# Altium PCB cpuPCB-v6.PcbDoc (part 2 of 3)
Units mil, origin at the board's own origin, x right, y up, seen from the top; angles counter-clockwise.
Board outline 3900 x 3900 mil, 2 copper layers (Top Layer, Bottom Layer); 139 components, 120 nets, 548 pads, 249 vias.
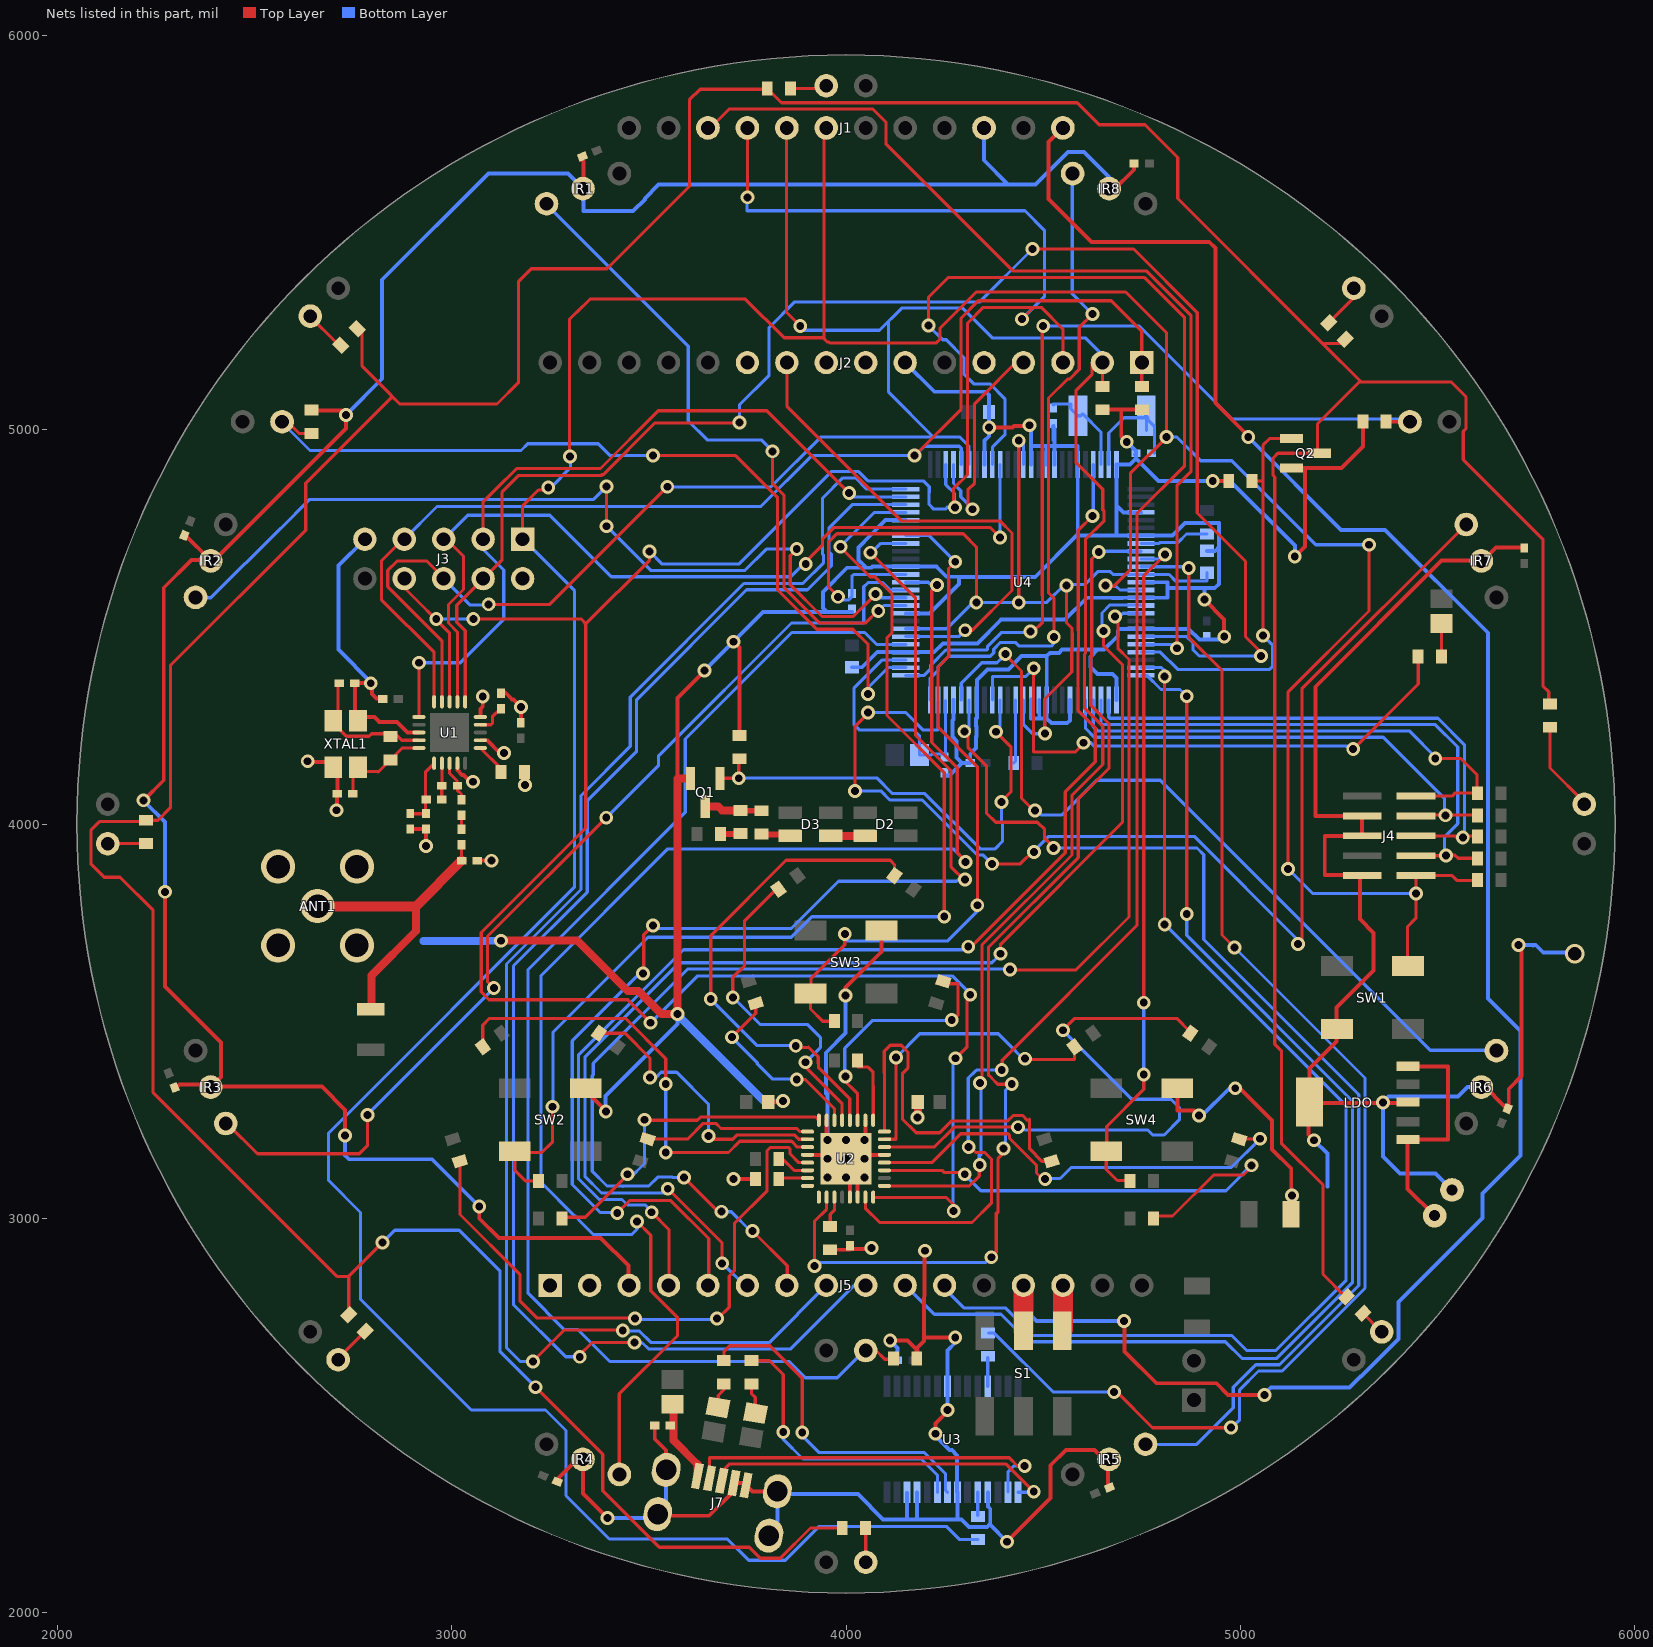
[diagram p2: the nets of this part, all layers, seen from the top]

## Via types
v1: diameter 35, hole 20, Top Layer to Bottom Layer, 240 vias
v2: diameter 180, hole 160, Top Layer to Bottom Layer, 4 vias
v3: diameter 25.98, hole 12.99, Top Layer to Bottom Layer, tented top, 4 vias
v4: diameter 50, hole 35, Top Layer to Bottom Layer, 1 vias

## Nets (pads, with @x,y where several pads share a name; then routed paths per layer and width w, separated by ;. In a path a pad name is that pad's centre, name@x,y a point inside that pad or via, vN(x,y) a via of type N, cw(c..) or ccw(c..) an arc to the next point about the centre after c; other vN are vias at no path point) (continued)
GND: ANT1.2 ANT1.3 ANT1.4 ANT1.5 C1.1 C2.1 C3.1 C4.1 C6.1 C7.1 C8.1 C9.1 C10.1 C11.1 C12.1 C13.1 C14.1 C15.1 C16.1 C17.1 C18.1 C19.2 C20.1 C21.1 C22.1 C23.1 C24.1 C25.1 C26.1 C27.1 C28.1 C29.1 C30.1 C31.1 C32.1 IR1.2 IR2.2 IR3.2 IR4.2 IR5.2 IR6.2 IR7.2 IR8.2 J1.10 J2.7 J3.9 J4.3 J4.5 J4.9 J5.3 J6.2 J7.4 J7.5 J7.6 J7.7 J7.8 J7.9 LDO.3 LDO.6 Q1.2 Q2.2 R2.1 R6.2 R9.2 R24.2 R25.1 R28.2 R35.1 R36.1 R40.1 R41.1 SW1.2 SW2.2 SW3.2 SW4.2 U1.8 U1.14 U1.17 U1.20 U2.5 U2.10 U2.15 U2.20 U2.29 U2.30 U2.33 U3.7 U3.18 U3.21 U3.25 U3.26 U4.4 U4.9 U4.15 U4.21 U4.33 U4.39 U4.41 U4.42 U4.45 U4.50 U4.54 U4.57 U4.63 U4.65 U4.69 U4.76 U4.82 U4.85 U4.86 U4.87 U4.94 U4.97 XTAL1.2 XTAL1.4 | length 28280.2
  Top Layer w10: v1(2219,4060) 2270,4111 2270,4599 2340,4669 IR2.2@2387,4669 ; v1(2273,3828) 2273,3588 2415,3446 2415,3359 IR3.2@2389,3333 ; C17.1@2300.55,3329.55 2310,3339 2370,3339 2375,3334 2671,3334 2730,3275 v1(2730,3210) ; C11.1@2325.5,4731.5 2387,4670 IR2.2@2387,4669 ; v1(2635,4159) 2637,4157 XTAL1.2@2700,4157 ; R6.2@2645,5048 2721,5048 v1(2732,5037) ; XTAL1.2@2700,4158.89 XTAL1.2@2700,4157 ; XTAL1.2@2701,4157 XTAL1.2@2700,4157 ; v1@2709.32,4036.32 C2.1@2709.32,4076 ; C2.1@2710,4078 2711,4079 2711,4136 2700,4147 XTAL1.2@2700,4157 ; v1@2732,5039 v1(2732,5037) ; C1.1@2754.68,4357.67 C1.1@2754.68,4357 v1(2795,4357) ; C1.1@2755,4357 2755,4283 XTAL1.4@2764,4274 ; XTAL1.4@2765,4262 2774,4271 2804,4271 2816.8,4258.2 2816.9,4258.31 ; v1@2798,4355 2798,4330 2810,4318 C8.1@2816.32,4318 ; 2816,4258.31 2862,4258.31 2888.31,4232 U1.8@2917.24,4232 ; C4.1@2897,3988 2897.68,3987.32 C3.1@2935,3987.32 v1(2935,3944) ; U1.14@3014.68,4154.24 3014.68,4136.77 3026.73,4124.73 ; 3026.95,4124.51 3030.49,4124.51 3049.5,4105.5 3051,4107 v1(3054,4107) ; C6.1@3064.68,3907 v1(3101,3907) ; v1(3070,3030) 3070,3000 3120,2950 3378,2950 3448,2880 J5.3@3448,2831 ; U1.17@3072.76,4212.31 3090.68,4212.31 3092,4211 ; U1.20@3072.76,4271.37 3072.76,4291.76 3079,4298 v1(3079,4323) ; 3091.99,4210.55 3120.54,4182 3131,4182 v1(3133,4180) ; C7.1@3127,4334 3135,4334 3154,4315 ; 3153,4316 3157,4316 v1(3176,4297) ; v1@3169.72,4297 v1(3176,4297) ; C9.1@3174,4256.69 3174.68,4256.69 C9.1@3175,4257 ; C9.1@3174,4257 3176,4259 v1(3176,4297) ; R2.1@3184.53,4142 3184.53,4103.53 3174.5,4093.5 3180.5,4093.5 v1(3186,4099) ; C23.1@3272,2332.91 3272,2343 3333,2404 3333,2302 v1(3395,2240) ; C10.1@3327,5687 3334,5679.99 IR1.2@3334,5608 ; SW2.2@3342,3319 3344,3319 v1@3391,3272 ; C15.1@3515,2469 3515,2441 3543.89,2412.11 J7.6@3543.89,2362.17 ; J7.7@3516,2246 3652.82,2246 3714.77,2307.96 3714.77,2327.89 J7.4@3715.93,2329.04 3740.96,2329.04 3763,2307 J7.9@3825,2307 ; 3572,4117 3573,4118 3573,4319 v1@3643,4389 ; v1(3715,3100) R24.2@3770.47,3100 ; v1(3715,4462) 3730,4447 R35.1@3730,4224.53 ; C14.1@3802.56,3295 3825,3295 v1@3826,3294 ; U2.20@3902.56,3161.14 U2.33@3952.76,3161.14 ; U2.33@3950.79,3205.79 U2.15@3950.79,3248.74 ; R25.1@3960,2920.47 4009.53,2920.47 4011.06,2922 4058,2922 4060,2920 v1(4065,2925) 4060,2925 v1@4057.44,2922.44 ; v1(3999,3565) 3999,3585 4090,3676 SW3.2@4090,3730 ; C20.1@4005,2921 4010,2921 C20.1@4010,2922.44 ; U2.29@4009.84,3053.86 U2.33@4009.84,3099.84 ; U2.30@4029.53,3053.86 U2.33@4029.53,3099.53 ; v1(4047.24,3198.54) 4051.14,3194.65 4051.14,3161.14 U2.5@4097.44,3161.14 ; U2.33@4049.21,3199.21 U2.10@4049.21,3248.74 ; v1(4112,2690) 4156,2690 4181,2665 R28.2@4181,2644 ; R28.2@4179,2649 4179,2670 4198,2689 4199,2914 v1@4200,2919 ; 4200,2698 v1(4277,2698) ; v1(4227,2454) 4227,2480 4257,2510 v1(4257,2514) ; v1(4363,5005) 4422,5005 4426,5009 v1@4465,5009 ; v1(4408,2180) 4432.5,2204.5 ; 4434,2206 4432.5,2204.5 ; R41.1@4650,5050 4651,5051 4698,5051 ; C24.1@4664.46,2320.55 IR5.2@4664.46,2380.54 ; IR5.2@4669,2392 4651,2392 4630,2413 4558,2413 4519,2374 4519,2291 4432.5,2204.5 ; IR8.2@4670,5606 4677,5606 4730,5659 C12.1@4730,5667.44 ; v1(4712,4969) 4698,4983 4698,5051 ; R40.1@4749,5051 4698,5051 ; SW4.2@4841,3329 4841,3274 4882,3274 v1(4895,3261) ; v1(4909,4569) 4959,4519 v1(4959,4475) ; v1(4930,4870) R36.1@4970.47,4870 ; v1(4987,3330) 4988,3330 5000,3327 5002,3327 5080.5,3248.5 5080.5,3174.5 5129,3126 C19.2@5129,3011 ; Q2.2@5124.57,4902.6 5164,4902.6 ; v1(5138,4678.58) 5163.42,4704 5164,4704 5164,4900 ; 5163,4902 5164,4903 5256,4903 5310.47,4957.47 R9.2@5310.47,5020 ; LDO.6@5173,3262 5173,3212 v1(5187,3198) ; LDO.6@5173,3293 LDO.3@5419,3293 ; LDO.6@5175,3297 5175,3380 5244,3449 5244,3535 5338,3629 5338,3724 5303,3759 5303,3871 5214,3871 5214,3970 J4.5@5308.89,3970 ; J4.5@5308.89,3968.89 J4.5@5308.89,3970 ; IR7.2@5608,4661 IR7.2@5613,4666 ; IR7.2@5608,4666 IR7.2@5613,4666 ; IR7.2@5608,4668 5510,4668 5190,4348 5190,4020.39 J4.3@5308.89,4020.39 J4.5@5308.89,3970 ; IR6.2@5620,3334 5668.54,3285.46 5680.55,3285.46 5680.55,3328.55 5713,3361 5713,3677 5698,3692 5699,3693 v1(5705,3693) ; C13.1@5713.44,4701 5648,4701 IR7.2@5613,4666 ; IR2.2@2387,4669 2388,4669 2389,4670 IR2.2@2389,4667 ; IR2.2@2387,4669 IR2.2@2389,4667 ; IR2.2@2389,4667 2395.69,4667 2732,5003.31 v1(2732,5037)
  Top Layer w20: v1(3125,3704) 3125,3705 3318,3705 3446.5,3576.5 3473.7,3576.5 3532.2,3518 v1(3573,3518) 3573,4115.43 Q1.2@3605.6,4115.43 ; v1@4182.44,3260.44 C21.1@4182.44,3295
  Bottom Layer w10: v1(2219,4060) 2219,4059 2273,4005 v1(2273,3828) ; v1(2730,3210) 2730,3160 2740,3150 2950,3150 v1(3070,3030) ; v1(2732,5037) v1@2732.5,5037.5 ; v1@2732,5038 v1@2732.5,5037.5 ; v1@2734,5039 v1@2732.5,5037.5 ; J3.9@2780,4722 2713,4655 2713,4442 v1@2797,4358 ; IR1.2@3331,5613 3295,5649 3093,5649 2824,5380 2824,5129 v1@2732.5,5037.5 ; IR1.2@3334,5608 3334,5554 3460.04,5554 3490.04,5584 3490.04,5586.04 3525,5621 4480,5621 4563,5704 4604,5704 4667,5641 IR8.2@4667,5611 ; v1@3390,3271 3390,3310 3573,3493 3573,3515 3573.5,3515.5 v1@3575,3517 ; v1(3395,2240) 3521,2240 J7.7@3523,2242 ; J7.7@3517,2259 3543.89,2285.89 J7.6@3543.89,2362.17 ; v1(3641,4389) 3789.5,4537.5 3789.56,4537.44 3952,4537.44 ; 3792,3297 v1@3824,3297 ; J7.8@3806,2206 3826.11,2226.11 J7.9@3826.11,2307.83 ; J7.9@3825,2301 4030,2301 4094,2237 4155,2237 ; 3949,3317 3949,3419.96 3999,3469.96 v1(3999,3565) ; v1@3952,3103 3952.76,3103.76 v1(3952.76,3104.06) v1(3952.76,3151.3) v1(3952.76,3198.54) 3952.76,3316.06 ; v1@3999,3102 4000,3103 v1(4000,3104.06) v1(4000,3151.3) v1(4000,3198.54) ; C27.1@4015,4397.44 4040.77,4397.44 4079.17,4435.83 U4.4@4151.56,4435.83 4223.83,4435.83 4246.2,4458.2 4333.29,4458.2 4393.58,4518.5 4554.5,4518.5 4555,4518 4610.63,4573.63 4675.24,4573.63 4675.37,4573.5 4700.63,4573.5 4700.76,4573.63 U4.65@4748.01,4573.63 4815,4573.63 4815,4598 ; C32.1@4015,4537.44 3952,4537.44 ; v1(4047.24,3104.06) 4047.24,3102.76 v1@4050,3100 ; v1(4047.24,3198.54) v1(4047.24,3151.3) 4047.24,3107.76 v1@4050,3105 ; 4050,4651.11 4031.5,4669.61 4031.5,4701.62 4063.36,4733.48 4063.48,4733.48 4100.48,4770.48 U4.21@4151.56,4770.48 ; 4065,4649.69 4002.96,4649.69 3941.28,4588.01 3941.28,4548.16 3952,4537.44 ; 4065,4650 4067.37,4652.37 U4.15@4151.56,4652.37 4229.63,4652.37 4255,4627 4480,4627 4584.11,4731.11 U4.57@4748.01,4731.11 4827.57,4731.11 4859.46,4763 4945.72,4763 4945.72,4702.28 ; v1@4113,2690 4113,2689 4130.31,2671.68 C16.1@4130.31,2640 ; J2.7@4150,5190 J2.7@4150,5170 4224,5096 4354.56,5096 4362.56,5088 C26.1@4362.56,5045 v1@4362.56,5004 ; U4.9@4151.56,4534.26 4211.26,4534.26 4286,4609 4286,4623.74 4283.74,4626 4479,4626 ; U3.26@4155,2304 4155,2237 ; 4180.43,2238.43 U3.25@4180.43,2305.55 ; v1(4181,3256) 4184,3256 v1@4189,3261 ; v1(4227,2454) 4227,2447.87 4262.37,2412.5 4268.5,2412.5 4282,2399 U3.21@4282,2306 ; C28.1@4250,4122.44 4262,4122.44 4294.56,4155 ; v1(4257,2514) 4257.2,2514.2 U3.7@4257.2,2574.45 4257.2,2664.8 4277,2684.59 v1(4277,2698) ; 4272.62,4265 4272.62,4265.62 ; U4.97@4272.62,4314.77 4272.62,4265.62 ; 4273,4266 4272.62,4265.62 ; 4282.8,2237 U3.21@4282.8,2305.55 ; J1.10@4350,5765 4350,5683 4410,5623 ; U4.33@4351.36,4911.23 4351.36,4972 4362.56,4983.2 v1@4362.56,5004 ; U3.18@4359.57,2305.55 4359.57,2269.84 4365.72,2263.69 4365.72,2225.36 4358.1,2217.75 4311.9,2217.75 4292.65,2237 4155,2237 ; 4363,2222 4366,2222 v1(4408,2180) ; v1(4363,5005) v1@4362.56,5004 ; 4400,4392 4412,4392 4445.5,4425.5 4508.5,4425.5 4517,4434 4540.13,4434 4548.13,4442 4637.87,4442 ; 4400.37,4391.5 4399.87,4392 4358.68,4392 4331.68,4365 U4.94@4331.68,4314.77 4331.68,4268.87 4330,4267.19 4330,4248.13 4330.5,4247.63 4330.5,4222.37 4330,4221.87 4330,4193 4315,4178 4315,4155 4294.56,4155 ; U4.87@4469,4316 4469,4268 4469.05,4267.95 4490.05,4267.95 ; U4.39@4469.47,4911.23 4469.47,4959 ; v1@4469.47,5006 4469.47,4959 ; U4.86@4490,4315 4490,4268 4490.05,4267.95 ; U4.85@4508.84,4314.77 4508.84,4267.95 ; U4.41@4508.84,4911.23 4508.84,4956.84 4510,4958 ; U4.85@4509,4314.77 4509,4425 ; C29.1@4525,5007.44 4525,5005 4528.53,5001.47 4528.53,4959 ; C29.1@4526,5009.71 4526,4973 4528.53,4970.47 ; U4.42@4528.53,4911.23 4528.53,4959 ; U4.82@4567.9,4314.77 4567.9,4262.9 4561,4256 4520.79,4256 4508.84,4267.95 ; 4585,4732 4587.58,4734.58 U4.45@4587.58,4911.23 4587.58,4959 4528.53,4959 ; 4651,4442 4637.87,4442 ; 4654,4442 4689,4477 4689,4490 4693.89,4494.89 U4.69@4748.01,4494.89 4868.55,4494.89 4896,4467.44 4952,4467.44 4959,4474.44 v1(4959,4475) ; IR8.2@4660,5604 IR8.2@4671,5593 ; U4.76@4686.01,4314.77 4686.01,4370 4675.5,4380.5 4637.37,4380.5 4619.5,4398.37 4619.5,4423.63 4637.87,4442 ; 4686,4808 4686,4808.17 ; 4688,4732 4687,4732 4686,4733 4686,4808.17 ; v1(4712,4969) 4735.31,4945.69 C30.1@4735.31,4940 C30.1@4735.31,4934.69 ; 4720,4911 4720.23,4911.23 ; 4720.77,4911.23 4720.23,4911.23 ; C30.1@4733,4937 C30.1@4735.31,4934.69 ; U4.63@4748.01,4613 4815,4613 4815,4598 ; U4.54@4748.01,4790.17 4704,4790.17 4686,4808.17 ; v1(4895,3261) 4903,3261 4972,3330 v1(4987,3330) ; v1(4909,4569) 4909,4598 ; C31.1@4915,4692.56 4936.28,4692.56 4945.72,4702 4945.72,4608.69 4935.03,4598 4909,4598 ; v1(5138,4678.58) 5138,4706 4974,4870 4792,4870 4735.69,4926.31 4735.31,4926.31 ; v1(5187,3198) 5221,3164 5221,3081 ; v1(5362,3294) 5362,3157 5405,3114 5494.78,3114 J6.2@5536.66,3072.12 ; v1@5362,3295 5376,3309 5552,3309 5576,3333 IR6.2@5611,3333 ; v1(5705,3693) 5741.5,3693 ; 5742.5,3692 5741.5,3693 ; v4@5852,3664 5842,3674 5768,3674 5749,3693 5741.5,3693 ; 4272.62,4265.62 4269.5,4262.5 4269.5,4222.37 4280.72,4211.15 4280.72,4168.84 4294.56,4155 ; 4469.47,4959 4528.53,4959 ; 4490.05,4267.95 4508.84,4267.95 ; 4686,4808.17 4686,4871.99 ; 4686,4871.99 U4.50@4686,4896 ; 4686.01,4872 U4.50@4686.01,4896.01 ; U4.50@4686.01,4896.01 U4.50@4686.01,4911.23 4720.23,4911.23 ; 4720.23,4911.23 4735.31,4926.31 ; 4735.31,4926.31 C30.1@4735.31,4934.69 ; 4815,4598 4909,4598
  Bottom Layer w20: 2928,3703 3090,3703 3091,3704 v1(3125,3704) ; v1(3573,3518) 3573,3516 3573.5,3515.5 3792,3297
  other v1: 4200,2918 5131,3058 3391,3271 3840,3298 2708,4035 4465,5011
  other v4: 5848,3671
GYRO_ST: J2.9
GYRO_VREF: J2.8
GYROA_X_4: J2.11
GYROA_Z_4: J2.10 U4.6 | length 1298.5
  Top Layer w8: J2.10@3850,5190 3850,5059.5 4141.5,4768 4390.95,4768 4421,4737.95 4421,4592 4320.2,4491.2 v1(4302.2,4491.2)
  Bottom Layer w8: U4.6@4151.56,4475.2 4286.2,4475.2 v1(4302.2,4491.2)
IR_RECV_0: IR1.1 U4.10 | length 1662.5
  Top Layer w8: v1@3814,4944 3814,4862.63 3842.5,4834.13 3842.5,4599.87 3932.37,4510 4050,4510 4080,4540 v1(4082,4540)
  Bottom Layer w8: IR1.1@3241.61,5569.73 3600,5211.34 3600,5022 3648,4974 3785,4974 v1(3814,4945) ; v1(4082,4540) 4095.94,4553.94 U4.10@4151.56,4553.94
IR_RECV_1: IR2.1 U4.11 | length 2262.2
  Top Layer w8: v1@3393,4754 v1(3393,4856) ; v1(3875,4697) 3858.5,4680.5 3858.5,4606.5 3939,4526 4018,4526 v1(4075,4583)
  Bottom Layer w8: IR2.1@2353.73,4573.61 2389.61,4573.61 2565,4749 2566,4749 2640,4823 3360,4823 v1(3393,4856) ; v1(3393,4755) 3505,4643 3744,4643 3798,4697 v1(3875,4697) ; v1@3393,4855 v1(3393,4856) ; v1@3394,4856 v1(3393,4856) ; v1(4075,4583) 4084.37,4573.63 U4.11@4151.56,4573.63
IR_RECV_2: IR3.1 U4.12 | length 2574.3
  Top Layer w8: IR3.1@2430.27,3241.61 2507.88,3164 2766,3164 2787,3185 v1(2787,3262) ; v1(3107,3584) 3091,3600 3091,3715 v1(3392,4016)
  Bottom Layer w8: v1@2786,3263 v1(3107,3584) ; v1(3392,4016) 3524.92,4148.92 3524.92,4172.92 3861.69,4509.69 4045,4509.69 4045,4601.5 4056,4612.5 4092.81,4612.5 4112,4593.31 U4.12@4151.56,4593.31
IR_RECV_3: IR4.1 U4.13 | length 3626.4
  Top Layer w8: IR4.1@3425,2350 3425,2555 3573,2703 3573,2748.27 3505,2816.27 3505,2957 v1(3470,2992) ; v1(4231,4606) 4217.5,4592.5 4217.5,4206.75 4282,4142.25 4282,3927 4303,3906 v1(4303,3904)
  Bottom Layer w8: v1(3470,2992) 3470,2972 3457,2959 3359,2959 3323,2995 3323,2996 3313.63,3005.37 3312.63,3005.37 3226.5,3091.5 3226.5,3615.5 3548,3937 4272,3937 4303,3906 v1(4303,3904) ; U4.13@4151.56,4613 4209,4613 v1@4214,4608
IR_RECV_4: IR5.1 U4.95 | length 2925.8
  Top Layer w8: v1(4300,4235) 4309,4235 4309,4195 4356,4148 4356,4028 4379.5,4004.5 4485.22,4004.5 4503.5,3986.22 4503.5,3963.5 4526,3941 v1(4526,3939)
  Bottom Layer w8: v1(4300,4235) 4309,4235 4313,4239 4313,4241.99 4311.99,4243 U4.95@4311.99,4314.77 ; v1(4526,3939) 4890,3939 4907,3922 4907,3707 5300,3314 5300,2829.75 5099.25,2629 5039.37,2629 4982,2571.63 4982,2520 4889,2427 IR5.1@4762,2427
IR_RECV_5: IR6.1 U4.96 | length 2080.9
  Top Layer w8: v1@4403.5,4429.5 4445,4388 4445,4065 v1@4469,4041
  Bottom Layer w8: U4.96@4292.31,4314.77 4292.31,4357.31 4344,4409 4383,4409 v1@4396,4422 ; v1@4479,4035 4483,4035 4495,4023 4548,4023 4636,4111 4797,4111 5481.61,3426.39 IR6.1@5646.27,3426.39
  other v1: 4479,4034 4404,4431
IR_RECV_6: IR7.1 U4.99 | length 3042.2
  Top Layer w8: v1(4023,4084) 4023,4248 4056,4281 v1(4056,4283) ; v1(4370,3899) 4442,3899 v1@4474.5,3931.5 ; v1@5156,3706 5156,4343 5572.39,4759.39 IR7.1@5572.73,4759.39
  Bottom Layer w8: v1(4023,4084) 4088.16,4084 4111.16,4061 4193.37,4061 4333.37,3921 4348,3921 v1(4370,3899) ; v1(4056,4283) 4151,4283 4196,4238 4233,4238 U4.99@4233,4311 ; v1@4477,3931.72 4513.78,3968.5 4883.13,3968.5 v1@5146,3705.63
  other v1: 5146,3696 4477,3929
IR_RECV_7: IR8.1 U4.100 | length 1706.5
  Top Layer w8: v1@4521,4478.22 4519,4480.22 4527,4488.22 4527,4572.65 4513.5,4586.15 4513.5,5080.13 4561.85,5128.47 4567.2,5128.47 4591.53,5152.8 4591.53,5259.53 v1(4625,5293) ; v1(4527,4474) 4529,4474 4529,4466 4528,4465 v1@4528,4462
  Bottom Layer w8: U4.100@4213.57,4314.77 4213.57,4369.57 4233.5,4389.5 4233.5,4398.83 4259.87,4425.2 4365.73,4425.2 4374.5,4433.98 4374.5,4443.22 4391.78,4460.5 4429.56,4460.5 4439.06,4451 4520,4451 4529.5,4460.5 4528,4462 4528,4465 4529,4466 4529,4474 v1(4527,4474) ; IR8.1@4573.61,5646.27 4573.61,5344.39 v1(4625,5293)
JTAG_TCK: J4.4 R12.1 U4.80 | length 1290.7
  Top Layer w8: J4.4@5451,4023 R12.1@5597,4023
  Bottom Layer w8: U4.80@4607.27,4314.77 4607.27,4242.45 4629.72,4220 5257,4220 ; 5304.68,4220 5257,4220 ; v1@5518,4024 5518,4064 5362,4220 5257,4220
  other v1: 5520,4022
JTAG_TDI: J4.8 R18.1 U4.78 | length 1447.7
  Top Layer w8: J4.8@5445.11,3919.61 v1@5534.39,3919.61 ; v1@5523,3921 5544,3921 5552,3913 R18.1@5601.47,3913
  Bottom Layer w8: U4.78@4646.64,4314.77 4646.64,4252.99 4647.63,4252 5494.37,4252 5551,4195.37 5551,4001 5518,3968 5518,3933 v1@5525.5,3925.5
  other v1: 5521,3920
JTAG_TDO: J4.6 R17.1 U4.77 | length 1364.6
  Top Layer w8: J4.6@5445.11,3970 v1@5547,3970 ; v1@5547,3966 v1(5564,3966) ; v1@5564,3970 R17.1@5598,3970
  Bottom Layer w8: U4.77@4666.32,4314.77 4666.32,4270 4668.32,4268 5501,4268 5568,4201 5568,3970 v1(5564,3966)
JTAG_TMS: J4.2 R11.1 U4.79 | length 1307.6
  Top Layer w8: J4.2@5445.11,4070.79 5536.79,4070.79 5545,4079 R11.1@5600,4079 ; v1(5494,4166) 5559,4166 5600,4125 R11.1@5600,4079 ; R11.1@5600,4075 R11.1@5600,4079
  Bottom Layer w8: U4.79@4626.95,4314.77 4626.95,4247.05 4638,4236 5428,4236 5498,4166 v1(5494,4166)
LED_BLUE_0: D21.2 U2.3 | length 1285.6
  Top Layer w8: U2.3@4097.44,3121.77 4243.73,3121.77 4249.5,3116 v1@4289,3116 ; D21.2@4779.53,3000 4779.53,3006 4828,3006 4932,3110 5008,3110 5028,3130 v1(5028,3134.5)
  Bottom Layer w8: v1@4293.5,3118.5 4342,3070 4963.5,3070 v1(5028,3134.5)
  other v1: 4301,3112
LED_BLUE_1: D19.2 U2.4 | length 1137.4
  Top Layer w8: U2.4@4097.44,3141.46 4217.5,3141.46 4290.54,3214.5 4411.07,3214.5 4414.6,3210.98 4414.6,3203.12 4483,3134.72 4483,3115 4499,3099 v1@4506,3099 ; D19.2@4997.12,3201.08 v1@5045.92,3201.08
  Bottom Layer w8: v1@4506,3101 4543,3101 4571,3129 4977,3129 v1(5050,3202)
  other v1: 4505,3100
LED_BLUE_2: D13.2 U2.6 | length 1532.6
  Top Layer w8: U2.6@4097.44,3180.83 4134.83,3180.83 4135,3181 4224,3181 4274.29,3231.29 v1(4436,3231.29) ; v1(4550,3477) 4580,3507 4838.65,3507 4873.11,3472.54 D13.2@4873.11,3469.36
  Bottom Layer w8: 4454,3224 4765.28,3224 4777.78,3211.5 4806.5,3211.5 4846,3251 4846,3280 4824,3302 4725,3302 v1(4550,3477)
LED_BLUE_3: D12.2 U2.7 | length 779.7
  Top Layer w8: U2.7@4097.44,3200.51 4127,3200.51 v1(4127,3408) ; v1(4454,3405) 4451.64,3402.64 4579.11,3402.64 D12.2@4579.11,3434.64
  Bottom Layer w8: v1(4127,3408) 4187,3468 4386,3468 4411,3443 ; 4411.29,3443 4411,3443 ; v1@4451.36,3402.64 4411,3443 ; v1@4451.64,3402.64 v1(4454,3405)
LED_BLUE_4: D18.2 U2.8 | length 960.5
  Top Layer w8: U2.8@4097.44,3220.2 4098,3220.2 4098,3368 4097,3369 4097,3424 4112,3439 4140,3439 4157,3422 4157,3381 4143,3367 4143,3252 4178,3217 4237.37,3217 4267.66,3247.29 4410.28,3247.29 4423.78,3260.79 4448.22,3260.79 4461.26,3247.76 4465.5,3252 4465.5,3176.13 4496.71,3144.92 D18.2@4521.12,3144.92
LED_EXTRA: D17.2 U2.22 | length 84.3
  Top Layer w8: D17.2@3830,3150 3840,3150 3868.23,3121.77 U2.22@3902.56,3121.77
LED_FAULT: U2.25
LED_GREEN_0: D14.2 U2.9 | length 183.2
  Top Layer w8: D14.2@4029.53,3400 4029.53,3383.5 4056,3383.5 4068.9,3370.6 4068.9,3335.5 4069,3335.4 4069,3248.84 U2.9@4068.9,3248.74
LED_GREEN_1: D9.2 U2.11 | length 662.3
  Top Layer w8: v1@3990,3358 v1@4001,3358 ; v1@3992,3359 3992,3353.28 4029.53,3315.75 U2.11@4029.53,3248.74 ; D9.2@4247.12,3601.08 4247.12,3603 4255.12,3595 4284,3595 4284,3515 4272,3503 v1(4268,3503)
  Bottom Layer w8: v1@3997,3361 3997,3431 4068,3502 v1@4280,3502
  other v1: 3999,3360
LED_GREEN_2: D7.2 U2.12 | length 1276.9
  Top Layer w8: v1(3657,3556) 3657,3717 3848,3908 4112,3908 4123.11,3896.89 D7.2@4123.11,3869.36 ; v1(3872.69,3437.5) 3872.69,3438.69 v1@3874,3440 ; v1@3873,3441 v1@3874,3440 ; 3905,3433 3887.78,3433.5 3887.28,3433 3881,3433 v1@3874,3440 ; 3905,3434 3929.5,3409.5 3929.5,3392.51 3930,3392.01 3930,3383 4009.5,3303.5 4009.5,3249.08 U2.12@4009.84,3248.74
  Bottom Layer w8: v1(3657,3556) 3775,3438 3861,3438 v1@3874,3425
LED_GREEN_3: D5.2 U2.13 | length 861.1
  Top Layer w8: v1(3713,3560) 3713,3611 ; 3713.05,3610.95 3743,3640.91 3743,3754.91 3822.74,3834.64 D5.2@3829.11,3834.64 ; v1(3897,3396) 3897,3401 3900,3404 3900,3381 3990.16,3290.84 U2.13@3990.16,3248.74
  Bottom Layer w8: v1@3714,3560 3782,3492 3902,3492 3935,3459 3935,3433 3910.5,3408.5 ; v1(3897,3396) 3897,3401 v1@3900,3404
LED_GREEN_4: D8.2 U2.14 | length 477.5
  Top Layer w8: v1(3710.56,3459.44) 3771.12,3520 D8.2@3771.12,3544.92 ; v1(3875,3352) 3897,3352 3970.47,3278.53 U2.14@3970.47,3248.74
  Bottom Layer w8: v1(3710.56,3459.44) 3775,3395 3775,3392 3814,3353 v1@3876,3353
LED_HEARTBEAT: R10.2 U4.92 | length 1544.2
  Top Layer w8: v1(4476,4395) 4476,4376 4475,4375 4475,4183 4582,4183 4600,4201 v1@4607,4201 ; v1(4602,4206) v1@4616,4206 ; v1(5286,4190) 5451,4355 R10.2@5451,4425
  Bottom Layer w8: U4.92@4371.05,4314.77 4371.05,4374 4456,4374 4476,4394 v1(4476,4395) ; v1(4602,4206) 4621,4206 4628.5,4198.5 4628,4198 5246,4198 5267,4198 5268,4197 5275,4197 v1@5286,4186 ; v1@5278,4188 v1(5286,4190)
LED_IR_BEACON: Q1.1 R35.2 U4.91 | length 1226.9
  Top Layer w8: Q1.1@3682,4116 v1(3728,4116) R35.2@3728,4162 ; v1(4380,4234) 4418,4196 4418,4081 4395,4058 4395,4057 v1(4394,4056)
  Bottom Layer w8: v1(3728,4116) 3736,4108 3745,4117 4077.78,4117 4117.78,4077 4200,4077 4340,3937 4378,3937 4396.5,3955.5 4396.5,4001.5 4394,4004 ; v1(4380,4234) 4381,4235 v1@4381,4236 ; v1@4390.73,4245.73 U4.91@4390.73,4314.77 ; v1(4394,4056) 4394,4004 ; 4394.33,4003.67 4394,4004
LED_IR_COMMS: Q2.1 R36.2 U4.72 | length 1028.1
  Top Layer w8: R36.2@5029.53,4870 5057,4870 ; v1(5057,4478) 5057,4870 ; Q2.1@5124.57,4977.4 5074.4,4977.4 5057,4960 5057,4870
  Bottom Layer w8: U4.72@4748.01,4435.83 4797,4435.83 4840.83,4392 5074,4392 5082,4400 5082,4453 v1(5057,4478)
LED_MODE: U2.26 U4.59 | length 2775.9
  Top Layer w8: v1(3920,2879) 3919,2878 3913,2878 3920,2885 3920,2992.63 3950.79,3023.42 U2.26@3950.79,3053.86 ; v1(4368.5,2901.5) 4381,2914 4381,3013 ; 4369,3356 4384.81,3340.19 ; 4369.19,3355.81 4369.09,3355.81 4361,3363.91 4361,3686.75 4589,3914.75 4589,4064 4625.19,4100.19 4625.82,4100.19 4667,4141.37 4667,4254.63 4620.5,4301.13 4620.5,4423.22 4623,4425.72 4623,4672 v1(4641,4690) ; 4382,3012 4385,3015 4385,3151 4399,3165 v1(4399,3177) ; 4385,3340 4419.81,3340 v1(4420.31,3340.5)
  Bottom Layer w8: v1(3920,2879) 3929,2888 4355,2888 v1(4368.5,2901.5) ; v1(4399,3177) 4404,3182 4404,3324.19 v1(4420.31,3340.5) ; v1(4641,4690) 4642.74,4691.74 U4.59@4748.01,4691.74
LED_RED_0: D20.2 U2.16 | length 858.7
  Top Layer w8: D20.2@3278,3003 3339,3003 3444,3108 3444,3109 v1@3449.34,3114.34 ; v1(3489,3250) 3486,3250 3487.26,3248.74 3623.27,3248.74 3631.53,3257 3922.84,3257 U2.16@3931.1,3248.74
  Bottom Layer w8: v1(3446,3112) 3446,3115 3447,3115 3447,3110 3449,3108 3455,3108 v1@3455,3104 ; v1@3452,3102 3489,3139 v1(3489,3250)
LED_RED_1: D16.2 U2.17 | length 430.6
  Top Layer w8: D16.2@3497.12,3201.08 3598.24,3201.08 3638.16,3241 3670,3241 3683,3228 3875,3228 3882.8,3220.2 U2.17@3902.56,3220.2
LED_RED_2: D11.2 U2.18 | length 738.6
  Top Layer w8: D11.2@3373.11,3469.36 3440,3469.36 3503,3406.36 v1(3503,3357) ; v1(3651,3209) 3659.49,3200.51 3712.88,3200.51 3724.09,3211.72 3868.66,3211.72 3879.86,3200.51 U2.18@3902.56,3200.51
  Bottom Layer w8: v1(3503,3357) 3517.28,3357 3530.78,3370.5 3570.5,3370.5 3651,3290 v1(3651,3209) v1@3651,3208
LED_RED_3: D10.2 U2.19 | length 1184.7
  Top Layer w8: D10.2@3079.11,3434.64 3079.11,3490.11 3096,3507 3440.96,3507 3542.96,3405 ; v1(3543,3167) 3702,3167 3730.72,3195.72 3862.03,3195.72 3873,3184.75 3873,3184 3876.17,3180.83 U2.19@3902.56,3180.83 ; v1(3543,3341) 3543,3405
  Bottom Layer w8: v1(3543,3167) v1(3543,3341)
LED_RED_4: D15.2 U2.21 | length 1539.8
  Top Layer w8: D15.2@3021.12,3144.92 3021.12,3009.92 3173,2858.04 3173,2791 3217,2747 v1@3465,2747 ; v1(3673,2746) 3675,2746 3704,2775 3704,2854 3717,2867 3717,2987 3800,3070 3800,3172 3807.72,3179.72 3854.66,3179.72 3857.94,3176.43 3857.94,3163.51 3880,3141.46 U2.21@3902.56,3141.46
  Bottom Layer w8: v1@3470,2744 3671,2744 v1(3673,2746)
  other v1: 3465,2746
LED_SDO: U2.24
LIGHT_B: R28.1 R29.1 U4.5 | length 3307.4
  Top Layer w8: R29.1@4050,2663 4052,2665 4076,2665 4098,2643 R28.1@4119,2643
  Bottom Layer w8: R29.1@4052,2663 4045,2663 3978,2596 3896.98,2596 3855.98,2637 3401.37,2637 3320.37,2718 3285.97,2718 3194,2809.97 3194,3631 3592.5,4029.5 3592.5,4215.5 3862.69,4485.69 4047.31,4485.69 4077.48,4455.52 U4.5@4151.56,4455.52
LIGHT_FL: R5.1 R6.1 U4.2 | length 2232.8
  Top Layer w8: R5.1@2570,5018 2585.47,5018 2613,4990.47 R6.1@2645,4990.47 ; v1(3511,4934) 3720,4934 3826.5,4827.5 3826.5,4593.25 3925.75,4494 4017,4494 4056,4455 v1(4056,4330)
  Bottom Layer w8: R5.1@2570,5018 2641,4947 3176,4947 3193,4964 3372,4964 3402,4934 3498,4934 3511,4947 v1(3511,4934) ; v1(4056,4330) 4056,4346 4106.46,4396.46 U4.2@4151.56,4396.46
LIGHT_FR: R8.1 R9.1 U4.1 | length 2292.9
  Top Layer w8: v1@4471,4480 4476.5,4480 4476.5,4489.5 4498.5,4511.5 4498.5,4578.53 4497.5,4579.53 4497.5,5260.5 v1(4500,5263) ; R9.1@5370,5020 R8.1@5430,5020
  Bottom Layer w8: U4.1@4151.56,4376.78 4198.15,4376.78 4214.72,4393.35 4214.72,4402.68 4253.25,4441.2 4357.2,4441.2 4358.5,4442.5 4358.5,4449.85 4394.65,4486 4463,4486 v1@4468,4481 ; v1(4468,4488) v1@4468,4481 ; v1@4471,4478 v1@4468,4481 ; v1(4500,5263) 4742.96,5263 4978.96,5027 5423,5027 R8.1@5443,5007
MISC: J3.2 | length 7.1
  Top Layer w8: J3.2@3175,4627 J3.2@3180,4622
MOT0_CUR: J5.1
MOT0_PWMA: J5.4 U4.47 | length 3227.3
  Top Layer w8: v1(3507.31,3015.5) 3551,2971.81 J5.4@3551,2831 ; v1@4314,3685 4538.22,3909.22 4538.22,3909.5 4556,3927.28 4556,4081.37 4632,4157.37 4632,4244 4588.5,4287.5 4588.5,4438.53 ; 4589,4490.97 4589,4745 v1(4625,4781) ; 4589.5,4439.53 4589.5,4490.47
  Bottom Layer w8: v1(3507.31,3015.5) 3507.31,3017.69 3491,3034 3446,3034 3432,3048 3374,3048 3322,3100 3322,3415 3588,3681 4305,3681 v1@4311,3687 ; U4.47@4626.95,4911.23 U4.47@4626.95,4911.23 v1@4627,4784
  other v1: 4310,3689
MOT0_PWMB: J5.5 U4.18 | length 3147.6
  Top Layer w8: v1(3420,3014) 3451,3045 3556,3045 3652,2949 J5.5@3652,2828 ; v1@3487,3618 3487,3719 v1(3511,3743) ; v1@4063.5,4686.5 4176,4574 4176,4225.63 4266,4135.63 4266,3892 4302,3856 v1@4302,3855
  Bottom Layer w8: v1(3420,3014) 3419,3015 3377,3015 3306,3086 3306,3450 3468.5,3612.5 ; v1(3511,3743) 3519,3735 3861,3735 3981,3855 4280,3855 4284,3859 v1(4302,3859) ; v1@4067,4690 4088.43,4711.43 U4.18@4151.56,4711.43
  other v1: 3485,3621 4062,4688
MOT1_CUR: J5.2
MOT1_PWMA: J5.6 U4.66 | length 3157.6
  Top Layer w8: v1(3548,3075) 3548.63,3075 3686,2937.63 v1@3686,2884 ; v1(4392,3671) 4392,3670 v1@4395,3667 ; v1@4395,3671 4392,3674 4392,3695.12 4701,4004.12 4701,4404 4653,4452 v1(4653,4489)
  Bottom Layer w8: v1(3548,3075) 3537.5,3064.5 3380.13,3064.5 3338,3106.63 3338,3408.37 3577.63,3648 4370,3648 4383,3661 4384,3661 v1(4392,3671) ; v1@3686.5,2886.5 J5.6@3747,2826 ; v1@4649,4489 4649,4535 4669.5,4555.5 4746.46,4555.5 U4.66@4748.01,4553.94
  other v1: 3686,2886
MOT1_PWMB: J5.7 U4.67 | length 3345.8
  Top Layer w8: v1(3589,3104) 3676,3017 v1(3684,3017) ; v1(3763,2968) 3851,2880 J5.7@3851,2829 ; v1(4416,3631) 4417,3630 4583.28,3630 4717.5,3764.22 4717.5,4417.22 4689.5,4445.22 4689.5,4532.48 v1@4682,4524.98 ; v1@4682,4518 v1@4682,4524.98 ; v1(4682,4526) v1@4682,4524.98
  Bottom Layer w8: 3434.78,3080.5 3433.28,3082 ; v1(3589,3104) 3560.72,3104 3560.22,3104.5 3522.5,3104.5 3500,3082 3433.28,3082 ; v1(3684,3017) 3709,3017 3758,2968 v1(3763,2968) ; v1(4416,3631) 4415,3632 3598,3632 3359,3393 3359,3364 3356.5,3361.5 3356.5,3119.5 3394,3082 3433.28,3082 ; v1@4682,4518 v1@4682,4524.98 ; v1(4682,4526) v1@4682,4524.98 ; U4.67@4748.01,4534.26 4702.26,4534.26 4689,4521 4689,4531.98 v1@4682,4524.98
NetANT1_1: ANT1.1 ANT2.1 C5.1 C6.2 | length 762.2
  Top Layer w8: C6.2@3025,3908 C5.1@3025,3947.32
  Top Layer w20: ANT2.1@2797,3531 2797,3616 2909.32,3728.32 2909.32,3791
  Top Layer w25: ANT1.1@2657,3791 2909.32,3791 C6.2@3025.31,3907
NetC1_2: C1.2 R1.1 U1.9 XTAL1.1 | length 317.2
  Top Layer w8: XTAL1.1@2697,4258 2732.56,4222.44 2790.6,4222.44 2797.16,4229 R1.1@2842,4229 ; XTAL1.1@2701,4276 2712,4287 C1.2@2712,4359 ; R1.1@2857,4229 2873.68,4212.31 U1.9@2917.24,4212.31
NetC2_2: C2.2 R1.2 U1.10 XTAL1.3 | length 306.2
  Top Layer w8: C2.2@2750,4078 2750,4143 2764,4157 XTAL1.3@2776,4145 ; XTAL1.3@2757,4138 2774,4121 2774,4133 2814,4133 ; 2814,4132 2874.63,4192.63 U1.10@2917.24,4192.63
NetC3_2: C3.2 C4.2 L2.2 U1.11 | length 177.2
  Top Layer w8: C4.2@2894,4026 2934,4026 2934,4132.61 U1.11@2955.63,4154.24
NetC5_2: C5.2 L3.2 | length 36.7
  Top Layer w8: C5.2@3024,3986 3025,3987 L3.2@3025,4022.31
NetC7_2: C7.2 U1.19 | length 78.3
  Top Layer w8: U1.19@3072.76,4251.69 3099.68,4251.69 3104.08,4256.08 3104.08,4273.08 C7.2@3124,4293
NetC15_2: C15.2 J7.1 L5.1 | length 202.4
  Top Layer w20: C15.2@3562.56,2475 L5.1@3562.56,2524.44 ; C15.2@3563,2475 3563,2437 3623.14,2376.86 J7.1@3623.14,2346.91
NetC29_2: C29.2 U4.48 XTAL2.1 | length 299.9
  Bottom Layer w8: C29.2@4525,5062.56 4527.44,5062.56 4526.22,5063.78 4525,5065 4570,5065 XTAL2.1@4570,5053.39 ; U4.48@4646.64,4911.23 4646.64,4993.36 4600,5040 4595,5035 4590,5035 XTAL2.1@4588.39,5035 ; XTAL2.1@4570,5053.39 XTAL2.1@4571.69,5051.69 ; XTAL2.1@4570,5053.39 XTAL2.1@4588.39,5035 ; XTAL2.1@4571.69,5051.69 XTAL2.1@4588.39,5035 ; XTAL2.1@4571.69,5051.69 XTAL2.1@4588.39,5035
NetC30_2: C30.2 U4.49 XTAL2.2 | length 380.3
  Bottom Layer w8: U4.49@4666.32,4911.23 4666.32,4991.32 4705,5030 XTAL2.2@4760,5030 ; XTAL2.2@4761.61,4997.95 4761.61,5028.39 XTAL2.2@4761.61,5030 ; XTAL2.2@4761.61,5035 4761.61,5033.39 XTAL2.2@4761.61,5030 ; 4782.56,4977 4782.56,4940 4782.56,5007.44 XTAL2.2@4760,5030 ; XTAL2.2@4760,5030 4760,5035 4760.81,5034.19 4765,5030 XTAL2.2@4761.61,5030 ; XTAL2.2@4760,5030 XTAL2.2@4761.61,5030
NetD1_2: D1.2 R10.1 | length 80.2
  Top Layer w8: R10.1@5509.53,4425 5509.53,4504.53 D1.2@5510,4505
NetD2_4: D2.4 D3.2 | length 87.8
  Top Layer w8: D2.4@4048.82,3970 D2.4@4049,3970
  Top Layer w20: D3.2@3961.18,3970 D2.4@4048.82,3970
NetD3_4: D3.4 R15.2 | length 46.8
  Top Layer w15: R15.2@3786,3973 D3.4@3832.82,3973
NetD4_2: D4.2 R16.2 | length 96.9
  Top Layer w15: D4.2@3681.53,3975 3730,3975 D4.2@3681.53,3975
NetD6_2: D6.2 R31.2 | length 78.6
  Top Layer w8: R31.2@3760,2580.47 3760,2556 3770,2546 D6.2@3770,2506
NetD22_2: D22.2 R37.2 | length 61.3
  Top Layer w8: D22.2@3676,2525 3676,2551 3690,2565 R37.2@3690,2580.47
NetJ6_1: J6.1 LDO.1 LDO.5 | length 609.7
  Top Layer w10: LDO.5@5425,3385.55 5526,3385.55 5526,3200 LDO.1@5425,3200 5424,3200 5424,3075 J6.1@5492,3007
NetL1_1: L1.1 L2.1 U1.12 | length 91.4
  Top Layer w8: L2.1@2975,4063 2975,4099 2975.32,4099.31 U1.12@2975.32,4154.24
NetL1_2: L1.2 L3.1 U1.13 | length 104.4
  Top Layer w8: U1.13@2995,4154.24 2995,4128 3014,4109 L1.2@3014,4097 ; L1.2@3014.69,4097 3014.69,4085.31 3025,4075 L3.1@3025,4062
NetQ1_3: Q1.3 R15.1 R16.1 | length 138.7
  Top Layer w15: R16.1@3739,4033.53 R15.1@3786,4033.53
  Top Layer w20: Q1.3@3644.43,4044.57 3676,4044.57 3686.04,4034.53 R16.1@3732,4034.53
NetQ2_3: Q2.3 R4.2 R7.2 R13.2 R14.2 R19.2 R26.2 R27.2 R32.2 | length 12299.2
  Top Layer w8: R14.2@2222,4010 2222.47,4009.53 R14.2@2223.53,4009.53 ; R14.2@2224,4010 R14.2@2223.53,4009.53 ; R27.2@2739,2758 2739,2853 ; R19.2@2773,5255 2773,5161 2846,5088 ; v1(2825,2939) 2739,2853 ; 2846,5089 2846,5088 ; v1(3213,2572) 3383.39,2401.61 3383.39,2309.52 3526.91,2166 3754.78,2166 3782.46,2138.32 3833.32,2138.32 3910,2215 R32.2@3990.47,2215 ; 3602.5,5616.5 3394,5408 3202,5408 3170,5376 3170,5120 3115,5065 2868,5065 2846,5087 ; 3603,5619 3603,5836 3630,5863 3798.47,5863 R4.2@3800.47,5865 3836.47,5829 4586,5829 4642,5773 4758,5773 4841,5690 4841,5586 5209,5218 ; R7.2@5266,5229 5255,5218 5209,5218 ; R26.2@5270,2803 5265,2803 5209.36,2858.64 5209.36,3084.93 5104,3190.29 5104,3425 5087,3442 5087,4880 5083,4884 5083,4928 5095,4940 5195.43,4940 5195.43,5014.43 5302,5121 5534,5121 5572,5083 5572,5002.6 5565,4995.6 5565,4924 5767,4722 5767,4350 5782,4335 R13.2@5782,4307 ; 5306,5121 5209,5218 ; R14.2@2223.53,4009.53 2220,4006 2107,4006 2086,3985 2086,3898 2119,3865 2159,3865 2243,3781 2243,3319 2709,2853 2739,2853 ; R14.2@2223.53,4009.53 R14.2@2225,4009.53 2255.53,4009.53 2287,4041 2287,4402 2630,4745 2630,4864 2846,5080 2846,5087 ; 2846,5087 2846,5088
  Bottom Layer w8: v1(2825,2939) 2856,2970 3019,2970 3123,2866 3123,2662 v1@3212,2573
NetR2_2: R2.2 U1.16 | length 74.6
  Top Layer w8: U1.16@3072.76,4192.63 3124.39,4141 R2.2@3126,4141
NetR3_1: R3.1 U3.19 | length 58.5
  Bottom Layer w8: R3.1@4333.98,2247.02 U3.19@4333.98,2305.55
NetR4_1: R4.1 T1.1 | length 90
  Top Layer w8: R4.1@3859.53,5865 3946,5865 T1.1@3948,5867 ; T1.1@3950.47,5865.47 T1.1@3951,5866
NetR7_1: R7.1 T8.1 | length 111.8
  Top Layer w8: R7.1@5224.12,5270.88 5285,5331.76 5285,5356 T8.1@5284,5357
NetR13_1: R13.1 T7.1 | length 226.5
  Top Layer w8: R13.1@5785,4245.47 5785,4142 T7.1@5872,4055
NetR14_1: R14.1 T3.1 | length 95.2
  Top Layer w8: T3.1@2130,3950 2130.47,3950.47 R14.1@2225,3950.47
NetR19_1: R19.1 T2.1 | length 90.6
  Top Layer w8: T2.1@2643,5286 2643,5285.12 2705.64,5222.48 R19.1@2705.64,5223.64
NetR24_1: R24.1 U2.23 | length 73.4
  Top Layer w8: R24.1@3830,3100 3832.09,3102.09 U2.23@3902.56,3102.09
NetR25_2: R25.2 U2.27 | length 78.2
  Top Layer w8: R25.2@3960,2980 3960,3010 3970.47,3020.47 U2.27@3970.47,3053.86
NetR26_1: R26.1 T6.1 | length 62.4
  Top Layer w8: R26.1@5310.88,2759.12 T6.1@5355,2715
NetR27_1: R27.1 T4.1 | length 100.4
  Top Layer w8: T4.1@2715,2641 2715,2648.24 R27.1@2780.88,2714.12
NetR30_1: R30.1 U3.11 | length 73
  Bottom Layer w8: U3.11@4359.57,2574.45 R30.1@4359.57,2647.43
NetR31_1: R31.1 U3.23 | length 712.5
  Top Layer w8: R31.1@3761,2639 3806,2639 3841,2604 v1(3841,2458)
  Bottom Layer w8: 3841,2440 3891,2390 4191,2390 4231.61,2349.39 U3.23@4231.61,2305.55
NetR32_1: R32.1 T5.1 | length 86.4
  Top Layer w8: R32.1@4049,2214 4050,2213 T5.1@4050,2128
NetR33_1: R33.1 U4.58 | length 176.9
  Bottom Layer w8: U4.58@4748.01,4711.43 4794,4711.43 4796.68,4714.11 4842,4714.11 4863.36,4735.47 R33.1@4915,4735.47
NetR34_2: R34.2 U4.89 | length 161.7
  Bottom Layer w8: R34.2@4425.47,4155 4430.1,4159.63 U4.89@4430.1,4314.77
NetR37_1: R37.1 U3.22 | length 851.1
  Top Layer w8: R37.1@3691,2640 3691,2663 3705,2677 3807,2677 3889,2595 v1(3889,2457)
  Bottom Layer w8: v1@3889,2449 3932,2406 4199,2406 4252.28,2352.72 4252.28,2310.48 U3.22@4257.2,2305.55
QEI_0A: J5.8 U4.25 | length 3764.5
  Top Layer w8: v1(3206,2637) 3286,2717 3432,2717 v1@3433,2716
  Bottom Layer w8: v1(3206,2637) 3174,2637 3139,2672 3139,3644.88 3328,3833.88 3328,4072 3453,4197 3453,4321.63 3741.19,4609.81 3890.53,4609.81 3943.38,4662.66 3943.38,4681.28 3940.5,4684.15 3940.5,4826 3992,4877.5 4024.24,4877.5 4052.52,4849.22 U4.25@4151.56,4849.22 ; v1@3425,2716 3432,2709 3446.28,2709 3451.78,2714.5 3476.22,2714.5 3505.72,2685 3805,2685 J5.8@3950,2830
  other v1: 3434,2716
QEI_0B: J5.9 U4.23 | length 3656
  Top Layer w8: v1(3325,2649) 3325,2654 3356,2685 v1@3465,2685
  Bottom Layer w8: v1(3325,2649) 3289,2649 3157,2781 3157,3640.25 3344,3827.25 3344,4059.41 3469,4184.41 3469,4315 3747.81,4593.81 3902.37,4593.81 3962.78,4654.23 3962.78,4684.5 3956.5,4690.78 3956.5,4750.35 4016,4809.85 U4.23@4151.56,4809.85 ; v1@3464,2684 3484.09,2684 3499.09,2669 3860,2669 4020,2829 4050,2829 J5.9@4050,2830
  other v1: 3464,2685
QEI_1A: J5.10 U4.75 | length 3088.3
  Top Layer w8: v1(4864,3772) v1(4864,4324)
  Bottom Layer w8: J5.10@4150,2830 4171,2809 ; 4172,2809 4224,2757 4393,2757 4463,2687 4962,2687 5004,2645 5092.63,2645 5284,2836.37 5284,3297.5 4864,3717.5 v1(4864,3772) ; U4.75@4748.01,4376.78 4763,4376.78 4798.78,4341 4847,4341 v1(4864,4324)
QEI_1B: J5.11 U4.74 | length 2966
  Top Layer w8: v1(4808,3745.52) v1(4808,4374)
  Bottom Layer w8: J5.11@4243,2829 4299,2773 4404,2773 4474,2703 4978,2703 5016,2665 5090,2665 5268,2843 5268,3285.52 v1(4808,3745.52) ; U4.74@4748.01,4396.46 4800,4396.46 4808,4388.46 v1(4808,4374)
RADIO_CE: J3.4 U1.1 U4.70 | length 4048.9
  Top Layer w8: U1.1@3034.37,4309.76 3034.37,4489.88 3013,4511.25 3013,4555 3076,4618 3078,4618 J3.4@3081,4621 ; J3.4@3080,4622 3128,4670 3128,4842 3170,4884 3379.28,4884 3380.78,4885.5 3384.13,4885.5 3515.63,5017 3715,5017 3723,5025 v1(3730,5018) ; v1(4473,5458) 4729.25,5458 4890.5,5296.75 4890.5,4788.5 5013,4666 5013,4475 5052,4436 v1(5052,4426)
  Bottom Layer w8: v1(3730,5018) 3730,5063 3805,5138 3805,5259 3870,5324 4339,5324 v1(4473,5458) ; U4.70@4748.01,4475.2 4864,4475.2 4880,4459.2 4880,4442 4896,4426 v1(5052,4426)
RADIO_IRQ: J3.3 U1.6 U4.24 | length 1978.7
  Top Layer w8: v1(2917,4409) 2917.24,4408.76 U1.6@2917.24,4271.37 ; J3.3@3080,4722 3080,4817 3111.63,4848.63 3112,4848.63 3164.87,4901.5 3377.5,4901.5 3524,5048 3799,5048 v1(4008,4839)
  Bottom Layer w8: v1(2917,4409) 3022,4409 3132,4519 3132,4644 3082,4694 J3.3@3082,4712 ; J3.3@3073,4721 J3.3@3087,4721 ; v1(4008,4839) 4017.46,4829.54 U4.24@4151.56,4829.54
RST: J1.6 J3.1 J4.10 R3.2 R20.1 SW1.3 U4.64 | length 10240.9
  Top Layer w8: J3.1@3180,4722 3180,4807 3220,4847 3239,4847 v1(3245,4853) ; v1@3291,4931 v1@3299,4939 ; v1@3292,4932 v1(3300,4932) ; v1@3299,4933 3299,5280 3331,5312 3332,5312 3351,5331 3745,5331 3843,5233 3944,5233 3944,5761 J1.6@3947,5764 ; 3942,5233 3953,5222 3957,5222 3959,5220 4229,5220 4238.5,5229.5 4238.5,5257.5 4330,5349 4709,5349 4813,5245 v1(4813,4981) 4721,4889 4721,4645 4678,4602 4658,4602 v1(4658,4605) ; v1(5121,3886) 5121,4335 5326,4540 v1(5326,4708) v1@5326,4709 ; SW1.3@5424,3641 5424,3740 5445.11,3761.11 v1@5445.11,3824 ; v1(5445,3823.89) v1@5445.11,3824 ; R20.1@5602,3857 5549,3857 5536.79,3869.21 J4.10@5445.11,3869.21 v1@5445.11,3824
  Bottom Layer w8: J3.1@3180,4723 3312,4591 3312,3840.51 2688,3216.51 2688,3096 2769,3015 2769,2795 3050,2514 3238,2514 3290,2462 3290,2297 3400,2187 3699,2187 3753,2133 3846,2133 3932,2219 4254,2219 4287,2186 R3.2@4334,2186 ; v1(3245,4853) 3251,4853 3301,4903 v1@3301,4933 ; v1@3291,4931 3292,4932 v1(3300,4932) ; v1(4658,4605) 4658,4602 4686,4602 4694.69,4593.31 U4.64@4748.01,4593.31 ; v1(4813,4981) 4839.38,4981 4899.38,4921 4978,4921 5191,4708 v1(5326,4708) ; v1(5121,3886) 5183.11,3823.89 v1(5445,3823.89)
SPI_MISO: J2.1 J3.7 R40.2 U1.5 U4.30 | length 3067.5
  Top Layer w8: J3.7@2860,4704 J3.7@2877,4721 ; J3.7@2860,4705 2822,4667 2822,4569 2955.63,4435.37 U1.5@2955.63,4309.76 ; v1@4174.9,4935 4292,5052.1 4292,5283 4335.58,5326.58 4672.42,5326.58 4750,5249 J2.1@4750,5190 ; R40.2@4750,5110 J2.1@4750,5170
  Bottom Layer w8: J3.7@2880,4722 2963,4805 3784,4805 3913,4934 v1(4173.9,4934) ; v1@4174.45,4933.45 4199,4958 4287,4958 4292.31,4952.69 U4.30@4292.31,4911.23
SPI_MOSI: J1.5 J2.2 J3.6 R41.2 U1.4 U2.1 U4.31 | length 6523.8
  Top Layer w8: U1.4@2975.32,4309.76 2975.32,4464.69 2838,4602 2838,4643 2862,4667 2937,4667 J3.6@2986,4618 ; v1(3094,4557) 3249,4557 v1(3547,4855) ; 3849,5297 J1.5@3849,5769 ; 3849,5298 3863,5284 v1(3884,5263) ; U2.1@4097.44,3082.4 4313.12,3082.4 4338,3107.28 4338,3133 4339,3134 v1(4339,3135) ; v1(4339.59,3343.59) 4340,3344 4333,3344 4345,3356 4345,3693.37 4573,3921.37 4573,4072.82 4651,4150.82 4651,4248 4604.5,4294.5 4604.5,4429.85 4607,4432.35 4607,4721.28 4654.5,4768.78 4654.5,4793.22 4651,4796.72 4651,4849.25 4583,4917.25 4583,5099.02 4623.53,5139.54 4623.53,5163.53 J2.2@4650,5190 ; R41.2@4650,5109 J2.2@4650,5170
  Bottom Layer w8: J3.6@2980,4622 3047,4555 3096,4555 v1(3094,4557) ; v1@3549.5,4854.5 3809.5,4854.5 3936,4981 4222,4981 ; v1(3884,5263) 3884,5262 3894,5252 4085,5252 4141,5308 4296,5308 4372,5232 4608,5232 J2.2@4650,5190 ; 4108,5275 4108,5095 4222,4981 ; U4.31@4311.99,4911.23 4311.99,4958 4288.99,4981 4222,4981 ; v1@4333,3344 4340,3344 v1(4339.59,3343.59) ; v1(4339,3135) 4339,3134 4338,3133 4338,3165.23 4342,3161.23 v1@4342,3346
SPI_SCK: J1.4 J2.3 J3.8 U1.3 U2.32 U4.28 | length 7327.8
  Top Layer w8: J3.8@2878,4622 2878,4601 2995,4484 U1.3@2995,4309.76 ; v1(3055,4520) 3328,4520 3340,4508 ; 3339,4507 3340,4508 ; 3341,4507 3340.5,4507.5 3502,4669 3502,4686 v1@3500,4688 ; v1(3504,3496) 3505,3496 3446.5,3554.5 3094.78,3554.5 3075,3574.28 3075,3725 3340,3990 3340,4508 ; J1.4@3747,5764 3750,5761 v1(3750,5589) ; J1.4@3747,5767 J1.4@3749,5765 ; J1.4@3751,5759 J1.4@3755,5755 ; U2.32@4068.9,3053.86 4068.9,3053 4254,3053 v1@4273,3034 ; v1(4276,4803) 4273,4806 4273,4851 4308,4886 4308,5270 4348,5310 4473,5310 ; v1(4278,3406) 4307,3435 v1@4307,3558 ; v1(4446,5280) 4473,5307 4473,5310 ; J2.3@4550,5190 4550,5255 4495,5310 4473,5310
  Bottom Layer w8: v1(2961,4520) v1(3055,4520) ; v1@3501.5,4691.5 v1(3502,4691) 3534,4659 3728,4659 3962.5,4893.5 4032,4893.5 4055.5,4870 4196,4870 4211,4855 4211,4840.72 4210.5,4840.22 4210.5,4810.5 4222.5,4798.5 4252.22,4798.5 4257.72,4804 4280,4804 4280,4811.09 4275,4816.09 4275,4838.37 4252.94,4860.44 U4.28@4252.94,4911.23 ; v1(3504,3496) 3505,3496 3624,3615 4269,3615 v1@4316,3568 ; v1(3750,5589) 3749,5588 3749,5555 4454,5555 4503,5506 4503,5337 v1(4446,5280) ; v1@4271.5,3020.5 v1@4271.5,3399.5
  other v1: 4273,3019 4315,3567
SPI_SEL_ACCEL: J2.4 U4.29 | length 592.2
  Top Layer w8: v1(4321,4798) 4321,4797 4320,4797 4309,4808 4309,4847.38 4326,4864.38 4326,5066 J2.4@4450,5190
  Bottom Layer w8: U4.29@4272.62,4911.23 4272.62,4863.38 4291,4845 4291,4829.72 4321,4799.72 v1@4321,4797
SPI_SEL_AUDIO: J2.5
SPI_SEL_LCD: J1.3 U4.71 | length 2444.4
  Top Layer w8: J1.3@3654,5763 3704,5813 4068,5813 4101,5780 4101,5725 4424,5402 4762.63,5402 4874.5,5290.13 4874.5,4893 4839,4857.5 v1(4839,4445.52)
  Bottom Layer w8: U4.71@4748.01,4455.52 4829,4455.52 v1(4839,4445.52)
SPI_SEL_LED: U2.31 U4.34 | length 4190.7
  Top Layer w8: U2.31@4049.21,3053.86 4049.21,3025.79 4085.5,2989.5 4319.5,2989.5 4368.5,3038.5 4368.5,3150.5 4352,3167 4329.28,3167 v1@4315.28,3181 ; v1(4209,5264) 4209,5335 4260,5386 4756,5386 4858.5,5283.5 4858.5,4908.5 4738,4788 4738,3743 4396,3401 v1@4396,3375 ; v1@4308,3181 v1(4311,3181)
  Bottom Layer w8: v1(4209,5264) 4245,5228 4253,5228 ; 4254,5228 4299,5183 4299,5141 4324,5116 4365,5116 4403,5078 4403,4987 4371.05,4955.05 U4.34@4371.05,4911.23 ; v1(4311,3181) 4308,3181 4310.5,3183.5 4310,3184 4310,3355 4310.09,3355.09 4310.09,3355.81 4327.78,3373.5 4328.5,3373.5 4331,3376 4364,3376 ; 4368,3376 v1(4395,3376)
SPI_SEL_RADIO: J3.5 U1.2 U4.35 | length 2226.3
  Top Layer w8: J3.5@2985,4724 3030,4679 3030,4594.63 2992,4556.63 2992,4509.63 3014.68,4486.94 U1.2@3014.68,4309.76 ; v1(3898,4659) 3892,4659 3940,4707 3940,4721.63 3970.37,4752 4365.23,4752 v1(4390.73,4726.5)
  Bottom Layer w8: J3.5@2980,4722 3041,4783 3249,4783 3405,4627 3860,4627 3892,4659 v1(3898,4659) ; v1(4390.73,4726.5) U4.35@4390.73,4911.23
SW_BLUE: R23.1 SW4.3 U4.60 | length 1759.6
  Top Layer w8: SW4.3@4660,3170 4660,3124 4688,3096 R23.1@4721,3096 ; SW4.3@4661,3170 4661,3233 4755,3327 v1(4755,3365) ; v1(4755,3547) 4755,4629 v1(4809,4683)
  Bottom Layer w8: U4.60@4748.01,4672.06 4800,4672.06 4809,4681.06 v1(4809,4683) ; v1(4755,3365) 4755,3420 v1(4755,3547)
SW_GREEN: R21.1 SW3.3 U4.19 | length 1779.7
  Top Layer w8: SW3.3@3910,3570 3910,3531 3941,3500 R21.1@3970,3500 ; SW3.3@3911,3572 3911,3608 3997,3694 v1(3997,3721) ; 4260,4618.72 4260,4648 v1(4277,4665) ; 4260.5,4618.22 4260.5,4425 4233.5,4398 4233.5,4244.9 4333,4145.4 v1(4333,3794)
  Bottom Layer w8: v1(3997,3721) 3997,3703 4257,3703 4333,3779 v1(4333,3794) ; U4.19@4151.56,4731.11 4210.89,4731.11 v1(4277,4665)
SW_RED: R22.1 SW2.3 U4.22 | length 2901.2
  Top Layer w8: SW2.3@3160,3170 SW2.3@3160,3167 ; R22.1@3220,3095 3187,3095 3160,3122 SW2.3@3160,3167 ; v1(3256,3283) 3256,3194 3229,3167 SW2.3@3160,3167 ; v1(3986,4703) 3986,4702 4061,4627 4073,4627 4116.5,4583.5 4116.5,4484.78 4104,4472.28 4104,4275 4249,4130 v1@4249,3767
  Bottom Layer w8: 3256,3249 v1(3256,3283) 3257,3284 3257,3472 3498,3713 3861.63,3713 3913.63,3765 v1(4249,3765) ; v1@3986,4702 v1(3986,4703) ; v1@3997,4715 4072.17,4790.17 U4.22@4151.56,4790.17
USB_CTS: R30.2 U4.61 | length 3365.6
  Top Layer w8: v1(4680,2560) 4686.05,2560 4777.05,2469 v1@4960,2469 ; v1(4869,4649) 4869,4474 4953.5,4389.5 4953.5,3718.5 v1(4985,3687)
  Bottom Layer w8: R30.2@4362,2709 4376,2709 4525,2560 v1(4680,2560) ; U4.61@4748.01,4652.37 4865.63,4652.37 v1(4869,4649) ; v1@4972,2470 4979,2470 4998,2489 4998,2565 5046,2613 5105.88,2613 5316,2823.12 5316,3356 v1(4985,3687)
  other v1: 4976,2470
USBDM: J7.2 U3.16 | length 960.9
  Top Layer w8: J7.2@3654.07,2340.96 3654.07,2393 4414,2393 4435,2372 v1(4453,2372)
  Bottom Layer w8: U3.16@4411,2306 4411,2358 4425,2372 v1(4453,2372) v1@4452,2371
USBDP: J7.3 U3.15 | length 892.3
  Top Layer w8: J7.3@3685,2335 3687.15,2337.15 3687.15,2360.52 3703.64,2377 4406,2377 v1(4476,2307)
  Bottom Layer w8: U3.15@4436.34,2305.55 4475.55,2305.55 v1@4477,2307
VBAT: J5.14 S1.6 | length 112
  Top Layer w50: S1.6@4550,2718 J5.14@4550,2830
VBAT_SW: J1.12 J5.13 S1.5 | length 5276.7
  Top Layer w10: J1.12@4550,5765 4514,5729 4514,5585 4623,5476 4921,5476 4937,5460 4937,5067 5020,4984 v1(5020,4981) ; v1(4705,2740) 4705,2738 4706,2737 4706,2663 4787,2582 4939,2582 4969,2552 v1(5061,2552)
  Top Layer w50: S1.5@4450,2715 J5.13@4450,2830
  Bottom Layer w10: J5.13@4450,2832 4450,2773 4483,2740 v1(4705,2740) ; v1(5020,4981) 5255,4746 5367,4746 5628,4485 5628,3557 5710,3475 5710,3159 5614,3063 5614,3001 5407,2794 ; v1(5061,2552) 5061,2555 5077,2571 5277,2571 5304.64,2598.64 5305.46,2598.64 5401.36,2694.54 5401.36,2788.36 5407,2794 ; 5403,2790 5407,2794
VDD25: C31.2 C32.2 U4.7 U4.14 U4.38 U4.62 U4.88 | length 2797.5
  Top Layer w8: v1(3980,4576) 3972,4568 3972,4585 3956,4601 3956,4715 3977,4736 4296.97,4736 ; 4297.5,4735.5 4330.5,4702.5 v1(4330.5,4562) ; v1(4438,4562) v1(4438,4972) ; v1@4506,4240 4504,4242 4504,4317 4572.5,4385.5 4572.5,4445.15 4573.5,4446.15 4573.5,4483.85 4573,4484.35 4573,4496.35 4559,4510.35 v1(4559,4605)
  Bottom Layer w8: v1(3980,4576) 3972,4568 4007,4568 4015,4576 4015,4628.5 4019.19,4632.69 4072.04,4632.69 4072.36,4633 4094.15,4633 4094.47,4632.69 U4.14@4151.56,4632.69 ; U4.7@4151.56,4494.89 4255.89,4494.89 4323,4562 v1(4330.5,4562) v1(4438,4562) 4509,4562 4554,4607 4605,4607 4638,4640 4670,4640 ; v1(4438,4972) 4449.79,4960.21 U4.38@4449.79,4911.23 ; U4.88@4449.79,4314.77 4449.79,4253.21 4474,4229 4491,4229 v1@4493,4231 ; 4670.22,4640 4670,4640 ; C31.2@4915,4637.44 4915,4616 4836.04,4616 4819.36,4632.69 U4.62@4748.01,4632.69 4677.31,4632.69 4670,4640
  other v1: 4504.5,4229.16
VDDA: C28.2 L4.1 U4.3 U4.98 | length 680
  Bottom Layer w8: U4.3@4151.56,4416.15 4092.15,4416.15 4020,4344 4020,4253 4035,4238 4172.5,4238 4186.5,4224 L4.1@4186.5,4175 4216,4175 4218.56,4177.56 C28.2@4250,4177.56 ; C28.2@4252,4177.56 U4.98@4252,4313
pads on no net: ANT2.2 D2.2 D2.3 D3.1 D3.3 J1.1 J1.2 J1.7 J1.8 J1.9 J2.6 J2.12 J2.13 J2.14 J2.15 J2.16 J4.7 LDO.4 S1.1 S1.4 SW1.1 SW1.4 SW2.1 SW2.4 SW3.1 SW3.4 SW4.1 SW4.4 U1.21 U2.2 U3.2 U3.3 U3.6 U3.8 U3.9 U3.10 U3.12 U3.13 U3.14 U3.24 U3.27 U3.28 U4.16 U4.17 U4.37 U4.40 U4.43 U4.46 U4.51 U4.52 U4.53 U4.55
copper on no net:
  other v2: 2960,2830 5040,2830 2960,5170 5040,5170
  other v3: 2971.38,4208.38 3018.62,4208.38 2971.38,4255.62 3018.62,4255.62

## Polygon pours and split planes (outlines as drawn)
GND on Bottom Layer "GND" (solid, pour order 1002): 4095,2890 5227,2890 5227,3093 4095,3093
GND on Bottom Layer "GND" (solid, pour order 1003): 2485,3620 2948.66,3620 3153,3883 3150,4005 3262,4128 3269,4498 2788.48,4498 2485,4112.54
GND on Bottom Layer "LED_GND" (solid, pour order 1001): 3394,2780 3500,2780 3500,2861 3529,2890 4095,2890 4228,3024 4228,3335 3764,3335 3765,3236 3394,2869
3.3V on Top Layer "POWERPLANE" (solid, pour order 1000): 4952,2602 4952,2750 4838,2750 4838,2870 4776.45,2940 4767.42,2950 4650,2950 4700,2895 4700,2790 4834,2602

## Other copper
Top Layer:
  region net 3.3V: 4925,3430 4916.91,3435.88 4887.52,3395.43 4895.61,3389.55
  region net 3.3V: 4974.46,3140.04 4977.55,3149.55 4930,3165 4926.91,3155.49
  rectangle net 3.3V: 4715,3000 4725,3050
  region net 3.3V: 4633.09,3465.88 4625,3460 4654.39,3419.55 4662.48,3425.43
  region net 3.3V: 4224.46,3540.04 4227.55,3549.55 4180,3565 4176.91,3555.49
  region net 3.3V: 4175,3830 4166.91,3835.88 4137.52,3795.43 4145.61,3789.55
  region net 3.3V: 4502.45,3209.55 4505.54,3200.04 4553.09,3215.49 4550,3225
  region net 3.3V: 3883.09,3865.88 3875,3860 3904.39,3819.55 3912.48,3825.43
  rectangle net 3.3V: 3965,3400 3975,3450
  region net 3.3V: 3752.45,3609.55 3755.54,3600.04 3803.09,3615.49 3800,3625
  region net 3.3V: 3425,3430 3416.91,3435.88 3387.52,3395.43 3395.61,3389.55
  region net 3.3V: 3474.46,3140.04 3477.55,3149.55 3430,3165 3426.91,3155.49
  region net 3.3V: 3133.09,3465.88 3125,3460 3154.39,3419.55 3162.48,3425.43
  rectangle net 3.3V: 3215,3000 3225,3050
  region net 3.3V: 3002.45,3209.55 3005.54,3200.04 3053.09,3215.49 3050,3225
Bottom Layer:
  region net GND: 5883,3815 5881,3840 5873,3854 5858,3863 5841,3869 5827,3870 5813,3869 5800,3865 5788,3856 5730,3499 5732,3480 5735,3474 5737,3471 5740,3467 5745,3463 5751,3460 5763,3456 5776,3452 5787,3451 5797,3451 5809,3454 5816,3460 5821,3468
Multi-Layer:
  circle w10: c4000,4000 r1955

## Silkscreen, mask and mechanical layers (free items; w line width, h text height)
Top Overlay:
  drawing of 2369 lines, arcs and shapes, not listed
  text "sck" at 4583,5241 h45 r90
  text "miso" at 4770,5238 h45 r90
  text "mosi" at 4685,5236 h45 r90
  text "cs" at 4465,5034 h45 r90
  text "gnd" at 4171,4986 h45 r90
  text "gyro" at 3867,4948 h45 r90
  text "FR" at 5401,4810 h90
  text "FL" at 2450,4805 h90
  text "GND" at 2592,4702 h45
  text "Heart" at 5046,4596 h90
  text "Beat" at 5090,4482 h90
  text "RADIO" at 2371,4422 h90
  text "JTAG" at 5213,4238 h90
  text "IRbeacon" at 3828,4140 h90
  text "G" at 3967,3776 h90
  text "RED" at 3132,3520 h90
  text "BLUE" at 4598,3514 h90
  text "RST" at 5497,3510 h90
  text "rone-v1.6" at 5800,3477 h45 r81.85
  text "chg" at 4362,2926 h45 r90
  text "gnd" at 3388,2908 h45
  text "P0A" at 3578,2901 h45 r90
  text "P0B" at 3656,2901 h45 r90
  text "VBAT" at 4563,2900 h45 r90
  text "VBATS" at 4470,2898 h45 r90
  text "usb" at 4631,2897 h45 r90
  text "1" at 3276,2730 h60 r90
  text "1A" at 4172,2697 h45 r90
  text "1B" at 3877,2694 h45 r90
  text "1A" at 3789,2693 h45 r90
  text "Q1B" at 4250,2652 h45 r90
  text "33V" at 4775,2648 h45 r90
  text "ON" at 4652,2510 h90